# Altium PCB PCB.PcbDoc
Units mm, origin at the board's own origin, x right, y up, seen from the top; angles counter-clockwise.
Board outline 45 x 99.64 mm, 2 copper layers (Top Layer, Bottom Layer); 80 components, 50 nets, 243 pads, 87 vias.
Unrouted connection lines stored in the file: 13.
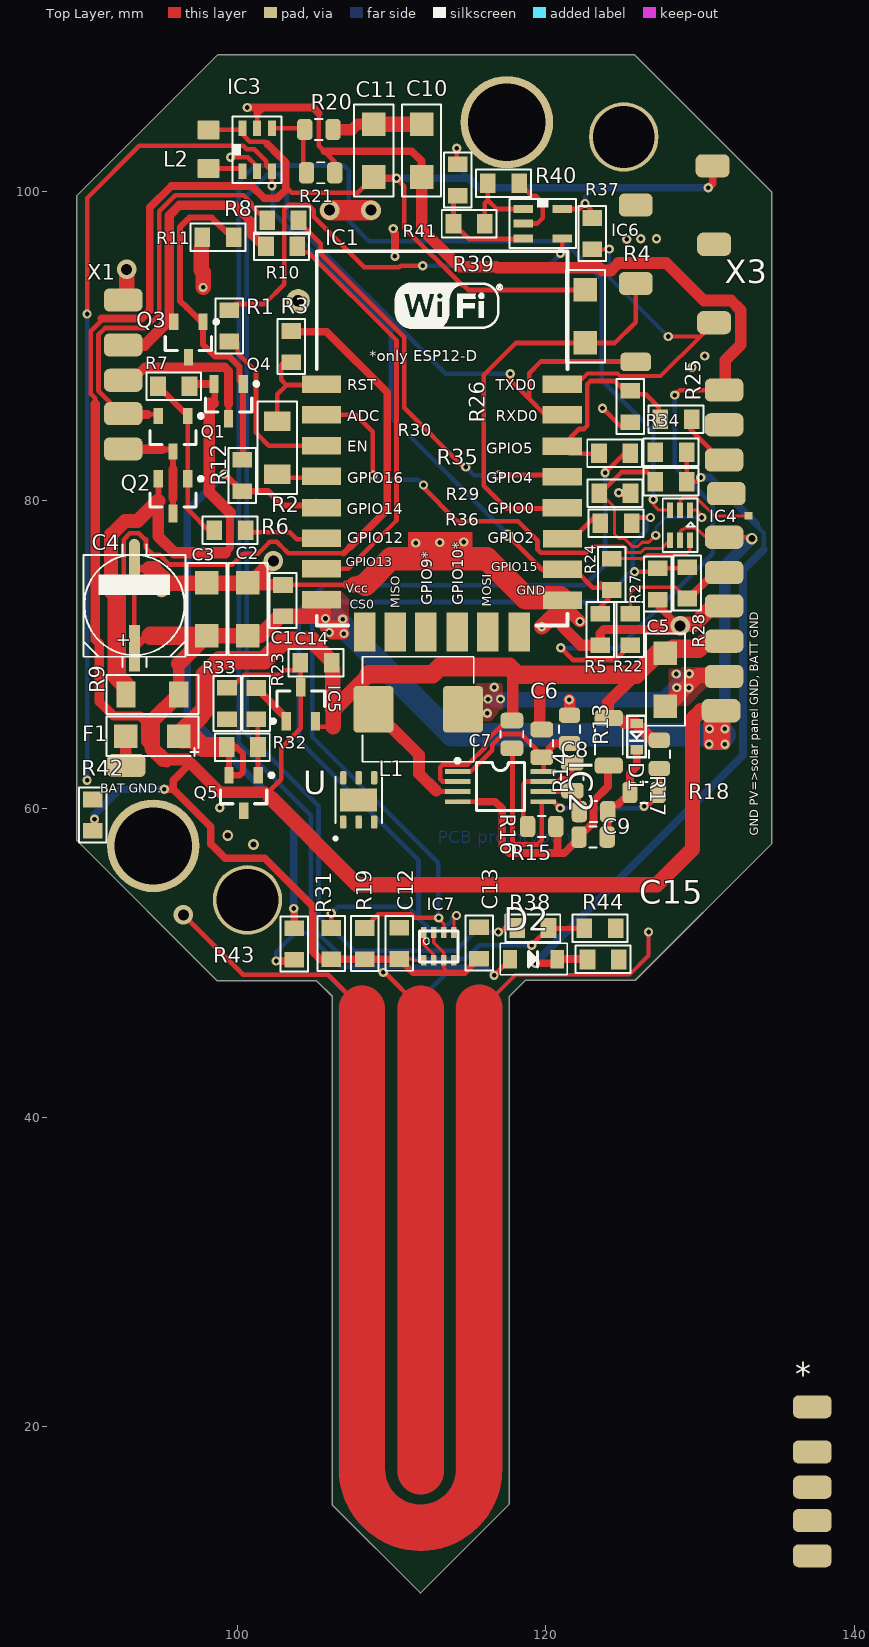
[diagram p0: Top Layer view]
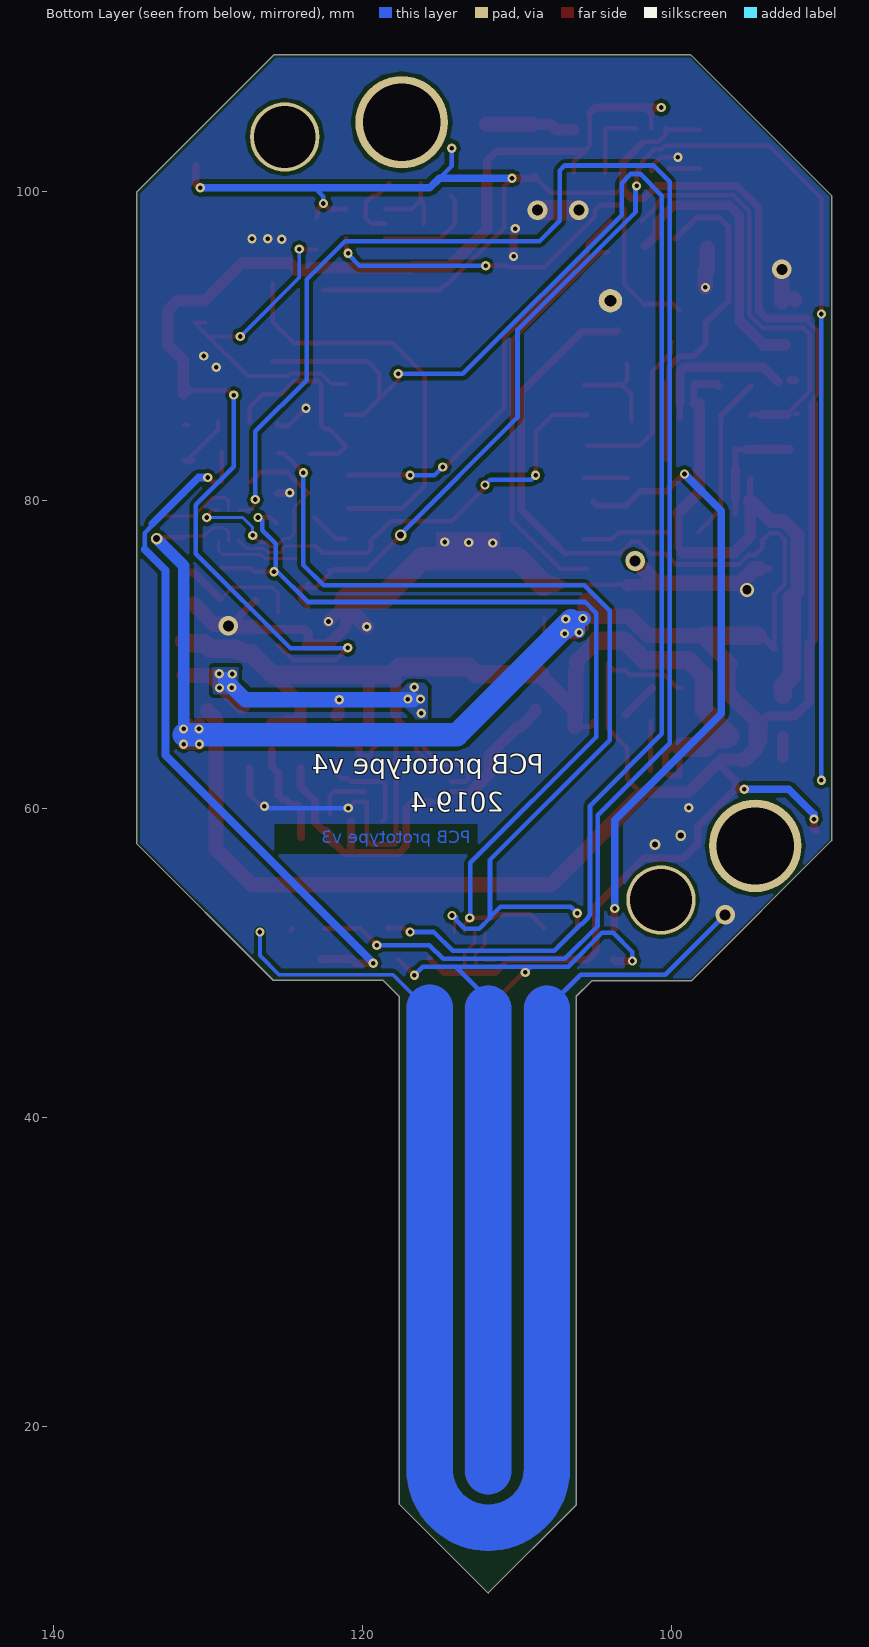
[diagram p1: Bottom Layer view, seen from below]

## Layer stack, top to bottom
Top Solder: solder mask 0.0102, Solder Resist, Dk 3.5
Top Layer: signal copper 0.0356
Dielectric1: dielectric 0.32, FR-4, Dk 4.8
Bottom Layer: signal copper 0.0356
Bottom Solder: solder mask 0.0102, Solder Resist, Dk 3.5

## Board outline
89.625,57.946 98.721,48.85 105.164,48.85 106.16,47.854 106.16,14.91 111.875,9.195 117.641,14.961 117.641,47.854 118.687,48.9 125.799,48.9 134.625,57.726 134.625,99.975 125.764,108.836 98.735,108.836 89.625,99.726

## Design rules (kind name [scope] priority, off if disabled: settings)
Clearance [All] p1: gap=0.25 ignorepadtopadclearanceinfootprint=FALSE except(0: Arc-Hole Track-Hole SMDPad-Hole THPad-Hole Via-Hole Fill-Hole Poly-Hole Region-Hole Text-Hole; 0.15: Arc-Arc Arc-Track Arc-SMDPad Track-Track Track-SMDPad; 0.2: Arc-Via Track-Via SMDPad-SMDPad; 0.5: THPad-THPad)
HoleSize [All] p1: absolutevalues=TRUE maxlimit=6.3 minlimit=0.2 maxpercent=80.000 minpercent=20.000
MinimumAnnularRing [All] p1: minimumring=0.13
MinimumSolderMaskSliver [All] p1 off: minsoldermaskwidth=0.254
PlaneConnect [All] p1: planeconnectstyle=Direct reliefexpansion=0.508 reliefentries=4 reliefconductorwidth=0.254 reliefairgap=0.254
PolygonConnect [All] p1: connectstyle=Direct reliefconductorwidth=0.254 reliefentries=4 polygonreliefangle="90 Angle" airgapwidth=0.254
RoutingVias [All] p1: holewidth=0.3 width=0.6 viastyle="Through Hole" minholewidth=0.2 minwidth=0.45 maxholewidth=6.3 maxwidth=6.7
SilkToSilkClearance [All] p1: silktosilkclearance=0.15
SilkToSolderMaskClearance [IsPad] p1: minsilkscreentomaskgap=0.15 clearancetoexposedcopper=TRUE
SolderMaskExpansion [All] p1: expansion=0.102 istentingtop=FALSE useseparateexpansions=TRUE expansionbottom=0.102 istentingbottom=TRUE
Width [All] p1: maxlimit=3 minlimit=0.15 preferedwidth=0.3 minimp=50.000000 maximp=50.000000 favimp=50.000000
25 further rules are at their usual default settings.

## Classes and differential pairs
net class "Voltage Booster": +5V GND GPIO15 NetIC3_1 NetIC3_4 VCC
net class SPV1040: "GND PV." NetC6_1 NetC7_1 NetC8_1 NetC8_2 NetC9_2 NetIC2_3 PV. VCC
net class H-Bridge: GND MOTOR_CONTROL1/PWM MOTOR_CONTROL2 MOTOR_SENSOR1 MOTOR_SENSOR2 NetQ1_1 NetQ1_2 NetQ1_3 NetQ2_2 NetQ3_1 NetQ3_2 NetQ3_3 VCC
net class ESP8266: GND VCC
component class Schematic: * C1 C2 C3 C4 C5 C6 C7 C8 C9 C10 C11 C14 D1 IC1 IC2 IC3 ICx L1 L2 R1 R2 R3 R4 R5 R13 R14 R15 R16 R17 R18 R20 R21 R33 R35 R36 R37 X3
component class H-bridge: Q1 Q2 Q3 Q4 R6 R7 R8 R9 R10 R11 R12 X1
component class Sheet2: C12 C13 C15 D2 F1 IC4 IC5 IC6 IC7 Q5 R19 R22 R23 R24 R25 R26 R27 R28 R29 R30 R31 R32 R34 R38 R39 R40 R41 R42 R43 R44 U

## Components (designator, comment, footprint, x,y, rotation, side; value= is the part's Value field where it differs from the comment)
* "szelep_csati1" Szelep_csati 135.992,10.846 r0 top
C1 "1nF" 0805C-TBD 102.975,72.725 r90 top
C2 "100nf" 1206C-GENERIC 100.7,71.225 r90 top value=100nF
C3 "22uF" 1206C-GENERIC 98.05,71.225 r90 top
C4 "470uF" PANACAP-D-GENERIC 93.35,73.2 r90 top
C5 "22uF" 1206C-GENERIC 127.75,66.65 r90 top
C6 "1nF" CAPC200X125X100L40N 119.736,64.237 r90 top
C7 "1nF" CAPC200X125X100L40N 117.805,64.821 r90 top
C8 "1uF" CAPC200X125X100L40N 121.717,62.078 r270 top
C9 "22uF" CAPC320X160X50L40N 124.079,64.338 r270 top
C10 "10uF" 1206C-GENERIC 111.95,100.928 r90 top
C11 "22uF" 1206C-GENERIC 108.85,100.928 r90 top
C12 "1nF" 0805C-GENERIC 110.5,50.525 r90 top
C13 "100nF" 0805C-GENERIC 115.675,50.55 r90 top
C14 "22uF" 0805C-GENERIC 104.35,69.45 r0 top
C15 "2u2" 0805C-GENERIC 122.949,50.241 r0 top value=2.2uF
D1 "DIODE-TRANSIL-GENERIC" SOD523 125.882,63.832 r90 top
D2 "1N5819" sod-123 120.74,50.267 r180 top
F1 "0" Fuse_1206 97.625,67.575 r180 top
IC1 "ESP8266 ESP-12-E" "ESP8266 ESP-12-E" 122.05,71.1 r0 top
IC2 "SPV1040" SPV1040 117.057,61.443 r0 top
IC3 "MCP1624" SOT23-6 100.35,101.428 r90 top
IC4 "FSA3157" SC70-6 129.35,79.35 r180 top
IC5 "TC54VN2702" SOT-23A-CB3_L 104.128,66.777 r90 top
IC6 "MAX6433" SOT23-5 118.53,98.857 r0 top
IC7 "BMP280" BMP280 114.55,49.825 r90 top
L1 "INDUCTOR" INDM730X660X300L160X290N 111.735,66.446 r180 top value=10uH
L2 "4.7uH" INDM2520X190N 98.15,102.728 r90 top
Q1 "AO3400A" INF-PG-SOT23_N 95.85,84.3 r270 top
Q2 "SI2301CDS" Micro3_N 95.85,80.25 r270 top
Q3 "AO3400A" INF-PG-SOT23_N 96.85,90.4 r270 top
Q4 "SI2301CDS" Micro3_N 99.45,86.4 r270 top
Q5 "IRLML6244" INF-PG-SOT23_N 100.425,61.025 r270 top
R1 "4.7K" 0805R-10K#1 99.5,92.3 r270 top value=4.7k
R2 "1k" 1206FB-50Z 102.6,85.1 r270 top
R3 "10K" 0805R-10K#1 103.518,90.957 r270 top value=10k
R4 "10K" 1206C-GENERIC 122.568,90.195 r90 top value=10k
R5 "10K" 0805R-10K#1 123.525,70.6 r90 top value=10k
R6 "390" 0805R-390 100.3,78.05 r180 top
R7 "4.7k" 0805R-10K#1 96.914,87.376 r180 top
R8 "1K" 0805R-1K 103.725,98.125 r180 top value=1k
R9 "1R" 1206FB-50Z 92.8,67.4 r0 top value=1
R10 "1K" 0805R-1K 102.125,96.45 r0 top value=1k
R11 "4.7k" 0805R-10K#2 99.531,97.028 r180 top
R12 "390" 0805R-390 100.325,82.35 r270 top
R13 "1K" RESC200X125X70L40N 121.539,65.151 r90 top value=1k
R14 "1K" RESC200X125X70L40N 123.088,59.817 r180 top value=1k
R15 "1K" RESC200X125X70L40N 119.736,58.852 r180 top value=1k
R16 "530m" RESC200X125X70L40N 123.063,58.166 r180 top
R17 "200k" RESC200X125X70L40N 127.356,63.525 r90 top
R18 "360k" RESC200X125X70L40N 126.365,61.062 r0 top
R19 "4.7k" 0805R-4K7 108.275,52.025 r270 top
R20 "200k" RESC200X125X70L40N 105.299,104.001 r0 top
R21 "680k" RESC200X125X70L40N 105.413,101.2 r0 top
R22 "4.7k" 0805R-4K7 125.475,70.85 r90 top
R23 "390" 0805R-470 101.25,67.575 r270 top
R24 "=390+' '+Tolerance" 0805R-390 124.275,74.425 r90 top value=390
R25 "2.2k" 0805R-4K7 127.674,85.242 r0 top
R26 "4.7k" 0805R-4K7 125.464,85.293 r90 top
R27 "3.3k" 0805R-4K7 127.25,73.8 r90 top
R28 "2.2k" 0805R-4K7 129.15,75.4 r270 top
R29 "='100k'+' '+Tolerance" 0805R-100 125.235,80.442 r180 top value=100k
R30 "='220k'+' '+Tolerance" 0805R-100 128.868,81.178 r180 top value=220k
R31 "4.7k" 0805R-4K7 106.1,52.025 r270 top
R32 "150K" 0805R-150K 101.1,64 r180 top value=150k
R33 "10K" 0805R-10K#1 99.35,65.8 r90 top value=10k
R34 "='510k'+' '+Tolerance" 0805R-100 127.344,83.109 r0 top value=510k
R35 "22" 0805R-22 125.225,83.025 r180 top
R36 "22" 0805R-22 125.312,78.486 r180 top
R37 "10k" 0805R-22 123,96.495 r90 top
R38 "8k2 1%" 0805R-4K7 118.396,52.275 r0 top value=8k2
R39 "1M" 0805R-TBD 114.288,99.974 r90 top
R40 "240k" 0805R-TBD 116.5,100.525 r0 top
R41 "22K" 0805R-TBD 114.275,97.9 r0 top value=22k
R42 "0" 0805R-TBD 90.641,58.826 r90 top
R43 "='100k'+' '+Tolerance" 0805R-100 103.7,52 r270 top value=100k
R44 "2.2k 1%" 0805R-1K 124.275,52.25 r180 top value=2.2k
U "HDC1080DMBT" SON100P300X300X80-7N 107.875,60.575 r90 top
X1 "Component_1" Szelep_csati 91.35,82.55 r0 top
X3 "X?" "program port" 125.825,88.95 r0 top

## Footprints (in the part's own frame and the unit in brackets; to place one, negate y for a bottom-side part, rotate by r counter-clockwise, add the part's x,y. Pads: shape width x height; smd on the part's side, far side on the other; paste and mask are expansions set on the pad)
0805C-GENERIC [mil] "CAPACITOR 0805"
  rect 40x50 smd: 1(-10,0) 2(70,0)
  silkscreen extent -40,-35 100,35, body extent -11,-25 70,25, height 26
0805C-TBD [mil] "CAPACITOR 0805"
  rect 40x50 smd: 1(-10,0) 2(70,0)
  silkscreen extent -40,-35 100,35, body extent -11,-25 70,25, height 26
0805R-1K [mil] "RESISTOR 0805"
  rect 40x50 smd: 1(-10,0) 2(70,0)
  silkscreen extent -40,-35 100,35, body extent -11,-25 70,25, height 27
0805R-4K7 [mil] "RESISTOR 0805"
  rect 40x50 smd: 1(-10,0) 2(70,0)
  silkscreen extent -40,-35 100,35, body extent -11,-25 70,25, height 27
0805R-10K#1 [mil] "RESISTOR 0805"
  rect 40x50 smd: 1(0,0) 2(80,0)
  silkscreen extent -30,-35 110,35, body extent -1,-25 80,25, height 27
0805R-10K#2 [mil] "RESISTOR 0805"
  rect 40x50 smd: 1(-10,0) 2(70,0)
  silkscreen extent -40,-35 100,35, body extent -11,-25 70,25, height 27
0805R-22 [mil] "RESISTOR 0805"
  rect 40x50 smd: 1(-10,0) 2(70,0)
  silkscreen extent -40,-35 100,35, body extent -11,-25 70,25, height 27
0805R-100 [mil] "RESISTOR 0805"
  rect 40x50 smd: 1(-10,0) 2(70,0)
  silkscreen extent -40,-35 100,35, body extent -11,-25 70,25, height 27
0805R-150K [mil] "RESISTOR 0805"
  rect 40x50 smd: 1(-10,0) 2(70,0)
  silkscreen extent -40,-35 100,35, body extent -11,-25 70,25, height 27
0805R-390 [mil] "RESISTOR 0805"
  rect 40x50 smd: 1(-10,0) 2(70,0)
  silkscreen extent -40,-35 100,35, body extent -11,-25 70,25, height 27
0805R-470 [mil] "RESISTOR 0805"
  rect 40x50 smd: 1(-10,0) 2(70,0)
  silkscreen extent -40,-35 100,35, body extent -11,-25 70,25, height 27
0805R-TBD [mil] "RESISTOR 0805 VALUE TO BE DETERMINED"
  rect 40x50 smd: 1(-10,0) 2(70,0)
  silkscreen extent -40,-35 100,35, body extent -11,-25 70,25, height 27
1206C-GENERIC [mil] "Polarized Capacitor (Radial); 2 Leads"
  rect 60x60 smd: 1(0,0) 2(135,0)
  silkscreen extent -50,-50 185,50, body extent -8,-29 147,29, height 46
1206FB-50Z [mm] "FERRITE BEAD 1206"
  rect 1.25x1.7 smd: 1(0,0) 2(3.429,0)
  silkscreen extent -1.27,-1.27 4.7,1.27, body extent 0.11,-0.81 3.31,0.8, height 0.84
BMP280 [mm]
  rect 0.7x0.35 smd: 1(2.156,2.458) 2(2.156,1.808) 3(2.156,1.158) 4(2.156,0.508) 5(0.358,0.501) 6(0.358,1.164) 7(0.358,1.814) 8(0.358,2.464)
  silkscreen extent 0.25,0.23 2.25,2.73
CAPC200X125X100L40N [mm] "0805"
  rrect50% 1.01x1.47 smd: 1(-0.9,0) 2(0.9,0)
  silkscreen extent -0.22,-0.73 0.22,0.73, body extent -1,-0.62 1,0.63, height 1
CAPC320X160X50L40N [mm] "Capacitor, Chip; 1206, 3.20 mm L X 1.60 mm W X 0.50 mm H body"
  rrect48% 1.04x1.82 smd: 1(-1.54,0) 2(1.54,0)
  silkscreen extent -0.84,-0.9 0.84,0.9, body extent -1.6,-0.8 1.6,0.8, height 0.5
"ESP8266 ESP-12-E" [mil] "ESP8266 ESP-12-E"
  rect 100x45 smd: 1(-653,646) 2(-653,568) 3(-653,489) 4(-653,411) 5(-653,331) 6(-653,253) 7(-653,175) 8(-653,96) 15(-38,95) 16(-38,174) 17(-38,252) 18(-39,331) 19(-39,410) 20(-39,488) 21(-39,568) 22(-39,646)
  rect 55x100 smd: 9(-543,14) 10(-465,14) 11(-387,14) 12(-307,14) 13(-229,14) 14(-149,14)
  silkscreen extent -665,30 -25,985, body extent -661,37 -31,981, height 86
Fuse_1206 [mil]
  rect 60x60 smd: 1(55,113) 2(190,113)
  silkscreen extent 5,63 240,163
INDM730X660X300L160X290N [mm] "Inductor, Molded Body; 7.20 mm L X 6.60 mm W X 3.00 mm H body"
  rrect19% 2.61x3.01 smd: 1(-2.9,0) 2(2.9,0)
  silkscreen extent -3.6,-3.4 3.6,3.4, body extent -3.65,-3.3 3.65,3.3, height 3
INDM2520X190N [mm] "Inductor, molded body 2.5x2.0mm"
  round 0.508 on Mech15: 0(0,0)
  rrect20% 1.25x1.45 smd: 1(-1.25,0) 2(1.25,0)
  Top Layer pour cut-out: -0.7,1 0.7,1 0.7,-1 -0.7,-1
  body extent -1.25,-1 1.25,1, height 1.79
INF-PG-SOT23_N [mm] "SOT23, 3-Leads, Body 2.9x1.3mm, Pitch 0.95mm, IPC Medium Density"
  rect 1.05x0.6 smd: 1(-1.15,0.95) 2(-1.15,-0.95) 3(1.15,0)
  silkscreen extent -1.27,-1.5 0.7,1.93, body extent -0.7,-1.5 0.7,1.5, height 1.1
Micro3_N [mm] "SOT23, 3-Leads, Body 2.9x1.3mm, Pitch 0.95mm, Lead Span 2.3mm, IPC Medium Density"
  rect 1.15x0.6 smd: 1(-1.125,0.95) 2(-1.125,-0.95) 3(1.125,0)
  silkscreen extent -1.25,-1.5 0.7,1.93, body extent -0.7,-1.5 0.7,1.5, height 1.12
PANACAP-D-GENERIC [mm] "Radial Cap, Thru-Hole; 2 Leads; 0.3 in Pin Spacing"
  rect 3x0.7 smd: +(-2.794,0)
  oval 3x0.7 smd: -(2.794,0)
  silkscreen extent -4,-3.3 3.93,3.3, body extent -3.5,-3.3 3.5,3.3, height 5.4
"program port" [mm]
  rrect50% 2x1.2 smd: 1(0,0)
  rrect50% 2.2x1.5 smd: 2(5.08,2.54) 3(0,5.08) 4(5.08,7.62) 5(0,10.16) 6(4.98,12.7)
RESC200X125X70L40N [mm] "Resistor, Chip; 0805, 2.00 mm L X 1.25 mm W X 0.70 mm H body"
  rrect51% 0.99x1.38 smd: 1(-0.915,0) 2(0.915,0)
  silkscreen extent -0.24,-0.68 0.24,0.68, body extent -1,-0.62 1,0.63, height 0.7
SC70-6 [mm]
  rect 0.4x1 smd mask+0.05: 1(0,0) 2(0.65,0) 3(1.3,0) 4(1.3,1.95) 5(0.65,1.95) 6(0,1.95)
  silkscreen extent -0.48,-0.75 1.78,2.7, body extent -0.48,0 1.78,1.96, height 1.04
SOD523 [mm]
  rect 0.6x0.8 smd: A(1.7,0) K(0,0)
  silkscreen extent -0.5,-0.6 2.2,0.6, body extent -0.05,-0.53 1.75,0.55, height 0.53
sod-123 [mm]
  rect 0.9x1.2 smd: A(3.048,0) K(0,0)
  silkscreen extent -0.64,-1.02 3.68,1.02, body extent -0.18,-0.87 3.3,0.87, height 0.79
SON100P300X300X80-7N [mm]
  rrect50% 0.86x0.42 smd: 1(-1.435,1) 2(-1.435,0) 3(-1.435,-1) 4(1.435,-1) 5(1.435,0) 6(1.435,1)
  rect 1.5x2.4 smd paste-2: 7(0,0)
  silkscreen extent -2.6,-1.5 1.5,1.6
SOT23-5 [mil]
  rect 50x20 smd: 1(0,0) 2(0,-37) 3(0,-75) 4(100,-75) 5(100,0)
  silkscreen extent -35,-100 135,25, body extent 2,-95 98,20, height 52
SOT23-6 [mil]
  rect 40x20 smd: 1(-5,0) 2(-5,-37) 3(-5,-75) 4(105,-75) 5(104.41,-37.4) 6(105,0)
  silkscreen extent -35,-100 135,25, body extent 2,-95 98,20, height 52
SOT-23A-CB3_L [mm] "SOT346, 3-Leads, Body 2.9x1.5mm, Pitch 0.95mm, Lead Span 2.6mm, IPC High Density"
  rect 1.2x0.6 smd: 1(-1.1,0.95) 2(-1.1,-0.95) 3(1.1,0)
  silkscreen extent -1.22,-1.55 0.85,1.92, body extent -0.85,-1.55 0.85,1.55, height 1.45
SPV1040 [mm]
  rect 1.65x0.3 smd: 1(-2.775,0.975) 2(-2.775,0.325) 3(-2.775,-0.325) 4(-2.775,-0.975) 5(2.775,-0.975) 6(2.775,-0.325) 7(2.775,0.325) 8(2.775,0.975)
  silkscreen extent -2.9,-1.55 1.55,1.8
Szelep_csati [mm]
  rrect50% 2.5x1.5 smd: "1 - Fekete"(1.27,10.414) "2 - Zöld"(1.27,7.493) "3 - Kék"(1.27,5.207) "4 - Piros"(1.27,3.048) "5 - Sárga"(1.27,0.762)

## Part data
C1 C6 C7: library part 0805C-100nF-25V-X7R-MUR, "CAPACITOR 0805 CERAMIC", Supplier Part Number 1=490-1673-1-ND, Supplier 1=Digi-Key
C2 C3 C5 C9 C10 C11: library part 1206C-10U-35V-X7R, "GENERIC CAPACITOR NON POLARISED 1206", Manufacturer="Taiyo Yuden", Manufacturer Part Number=GMK316F106ZL-T, Supplier Part Number 1=587-1352-2-ND, Reel=C90, Supplier 1=Digi-Key
C4: library part C+47U-6V3, "GENERIC CAPACITOR POLARISED", Supplier Part Number 1=PCE4375TR-ND, Supplier 1=Digi-Key
C8: library part 0805C-TBD, "CAPACITOR 0805 CERAMIC VALUE TO BE DETERMINED"
C12: library part C0805-GENERIC, "100nF"
C13: library part C0805-GENERIC
C14: library part C0805-GENERIC, "GENERIC CAPACITOR NON POLARISED0603", Assembly=No
C15: library part 0805C-2U2-6V3-X5R-PAN, "CAPACITOR 0805 CERAMIC", Manufacturer="Panasonic - ECG", Manufacturer Part Number=ECJ-1VB0J225K, Supplier Part Number 1=PCC2273TR-ND, Reel=C7, Supplier 1=Digi-Key
D1: "GENERIC TRANSIL"
D2: library part BZT52C5V6, "1N5819 SOD123", Supplier Part Number 1=BZT52C5V6-FDITR-ND, Part number=1N5819, Supplier 1=Digi-Key
F1: library part Fuse, Alternative=0
IC3: library part MCP1623, Part number=MCP1624
IC5: library part TC54VN2702ECB713, "1µA Voltage Detector, Open-Drain Output, 2.7V, 3-Pin SOT-23A, Industrial Temperature, Tape and Reel", Supplier Part Number 1=TC54VN2702ECB71TR-ND, ComponentLink1Description=Datasheet, ComponentLink1URL=http://ww1.microchip.com/downloads/en/DeviceDoc/21434h.pdf, ComponentLink2Description="Packaging Specification", ComponentLink2URL=http://www.microchip.com/stellent/groups/techpub_sg/documents/packagingspec/en012702.pdf, ComponentLink3Description="Microchip.com Home", ComponentLink3URL=http://www.microchip.com/, DatasheetVersion="revH, Dec-2007", PackageDescription="3-Lead Plastic Small Outline Transistor (CB) [SOT-23A]", PackageReference=SOT-23A-CB3, PackageVersion="revBB, Aug-2009", Part number=TC54VN2702, Published=29-Jan-2009, Publisher="Altium Limited", Supplier 1=Digi-Key, Supplier 2=Digi-Key, Supplier 3=Digi-Key, Supplier 4=Farnell, Supplier Part Number 2=TC54VN2702ECB71CT-ND, Supplier Part Number 3=TC54VN2702ECB71DKR-ND, Supplier Part Number 4=1292289
IC6: library part MAX6433-MAX6435, "MAX6433-MAX6435", Part number=MAX6433
L1: LCSC Part #=C132141, Alternatives=C139506
L2: library part INDUCTOR, "INDUCTOR", LCSC Part #=C1049
Q1: library part BSS806N, "N-Channel OptiMOS 2 Small-Signal-Transistor, 20 V VDS, 2.3 A ID, -55 to 150 degC, PG-SOT23, Reel, Green", Manufacturer=Infineon, PartNumber=IRLML6244, Alternatives="BSS806N, IRLML6244, IRLML6344", ComponentLink1Description="Manufacturer URL", ComponentLink1URL=http://www.infineon.com/, ComponentLink2Description=Datasheet, ComponentLink2URL=http://www.infineon.com/dgdl/BSS806N_Rev2.3_.pdf?folderId=db3a3043156fd573011622e10b5c1f67&fileId=db3a304330f686060131185f0553451c, ComponentLink3Description="Package Specification", ComponentLink3URL=http://www.infineon.com/dgdl/SOT23-Package_Overview.pdf?folderId=db3a30431936bc4b0119532290053c66&fileId=db3a30431936bc4b0119533468123c85, DatasheetVersion="Rev. 2.3", Green=TRUE, Halogen-free=TRUE, ID (max)="2.3 A", IDpuls (max)="9.3 A", Mounting Technology="Surface Mount", PackageDescription="3-Pin Small Outline Transistor Package, 2.9 x 1.3 mm Body, 0.95 mm Pitch", PackageReference=PG-SOT23, PackageVersion=Apr-08, Packing=Reel, Part number=AO3400A, Ptot (max)="0.5 W", QG="1.7 nC", RDS (on) (max)="57 mOhm", RDS (on) (max) (@1.8V)="82 mOhm", RDS (on) (max) (@2.5V)="57 mOhm", RthJA (max)="250 K/W", VDS (max)="20 V", VGS(th) (max)="0.75 V", VGS(th) (min)="0.3 V"
Q2 Q4: library part IRLML6401, "HEXFET Power MOSFET", Alternatives="IRLML2244, IRLML2246, IRLML6401", ComponentLink1Description="Manufacturer Link", ComponentLink1URL=http://www.irf.com/, ComponentLink2Description=Datasheet, ComponentLink2URL=http://www.irf.com/product-info/datasheets/data/IRLML6401.pdf, DatasheetVersion=2-Jul-2001, PackageDescription="3-Pin SOT-23 Package 0.95 mm Pitch, 2.3 mm Lead Span", PackageReference=Micro3, PackageVersion=Jul-2001, Part number=SI2301CDS, Published=17-Sep-2003, Publisher="Altium Limited"
Q3 Q5: library part BSS806N, "N-Channel OptiMOS 2 Small-Signal-Transistor, 20 V VDS, 2.3 A ID, -55 to 150 degC, PG-SOT23, Reel, Green", Manufacturer=Infineon, ComponentLink1Description="Manufacturer URL", ComponentLink1URL=http://www.infineon.com/, ComponentLink2Description=Datasheet, ComponentLink2URL=http://www.infineon.com/dgdl/BSS806N_Rev2.3_.pdf?folderId=db3a3043156fd573011622e10b5c1f67&fileId=db3a304330f686060131185f0553451c, ComponentLink3Description="Package Specification", ComponentLink3URL=http://www.infineon.com/dgdl/SOT23-Package_Overview.pdf?folderId=db3a30431936bc4b0119532290053c66&fileId=db3a30431936bc4b0119533468123c85, DatasheetVersion="Rev. 2.3", Green=TRUE, Halogen-free=TRUE, ID (max)="2.3 A", IDpuls (max)="9.3 A", Mounting Technology="Surface Mount", PackageDescription="3-Pin Small Outline Transistor Package, 2.9 x 1.3 mm Body, 0.95 mm Pitch", PackageReference=PG-SOT23, PackageVersion=Apr-08, Packing=Reel, PartNumber=BSS806N, Ptot (max)="0.5 W", QG="1.7 nC", RDS (on) (max)="57 mOhm", RDS (on) (max) (@1.8V)="82 mOhm", RDS (on) (max) (@2.5V)="57 mOhm", RthJA (max)="250 K/W", VDS (max)="20 V", VGS(th) (max)="0.75 V", VGS(th) (min)="0.3 V"
  Q3: Alternatives="BSS806N, IRLML6244, IRLML6344", Part number=AO3400A
  Q5: Part number=IRLML6244
R1 R3 R4 R5 R7 R11 R33: library part 0805R-10K, "RESISTOR 0805 1/4 WATT THIN FILM"
  R33: Assembly=No
R2: library part 0805R-1R, "0 vagy talan 1K? RESISTOR 0805 1/3 WATT", Supplier Part Number 1=541-1.0TADKR-ND, Reel=R84, Supplier 1=Digi-Key
R6 R12 R24: library part 0805R-390, "RESISTOR 0805 1/4 WATT THIN FILM"
R8 R10 R14 R15: library part 0805R-1K, "RESISTOR 0805 1/4 WATT THIN FILM"
R9 R13 R16: library part 0805R-1R, "RESISTOR 0805 1/3 WATT", Supplier Part Number 1=541-1.0TADKR-ND, Reel=R84, Supplier 1=Digi-Key
R17 R18: library part 0805R-680K, "RESISTOR 0805 1/4 WATT THIN FILM"
R19 R22 R25 R26 R27 R28 R31: library part 0805R-4K7, "RESISTOR 0805 1/4 WATT THIN FILM"
  R22 R27 R28: Assembly=No
R20: library part 0805R-820K, "RESISTOR 0805 1/4 WATT THIN FILM"
R21: library part 0805R-560K, "RESISTOR 0805 1/4 WATT THIN FILM"
R23: library part 0805R-470, "RESISTOR 0805 1/4 WATT THIN FILM"
R29 R30 R34 R43: library part 0805R-100, "RESISTOR 0805 1/4 WATT THIN FILM"
R32: library part 0805R-150K, "RESISTOR 0805 1/4 WATT THIN FILM"
R35 R36 R37: library part 0805R-22, "RESISTOR 0805 1/4 WATT THIN FILM"
R38: library part 0805R-4K7, "RESISTOR 0805 1/4 WATT THIN FILM", Tolerance=1%
R39 R40 R41 R42: library part 0805R-TBD, "RESISTOR 0805 VALUE TO BE DETERMINED"
  R39: Alternative=931k
  R40: Alternative=237k
  R41: Alternative=22k
  R42: Assembly=No
R44: library part 0805R-1K, "RESISTOR 0805 1/4 WATT THIN FILM", Tolerance=1%
U: "Humidity Temperature Sensor 0 ~ 100% RH IÂ²C Â±2% RH 15s Surface Mount", Package="WDFN-6 Texas Instruments", Availability=Unavailable, MF="Texas Instruments", MP=HDC1080DMBT, Price=None, SnapEDA_Link=https://www.snapeda.com/parts/HDC1080DMBT/Texas%20Instruments/view-part/472820/?ref=snap
X1: library part szelep_csati1
X3: library part "program port"
IC2: Part number=SPV1040
IC4: Part number=FSA3157
IC7: Part number=BMP280

## Free pads (board coordinates)
  round 6 hole 5: 0(94.575,57.6) 1(117.475,104.475)
  rect 0.5x0.5 smd: 0(133.125,78.975)
  rrect50% 2.5x1.5 smd: 1(131.55,87.125) 2(131.55,84.875) 3(131.55,82.589) 4(131.687,80.416) 5(131.55,77.589) 6(131.55,75.303) 7(131.55,73.144) 8(131.55,70.858) 9(131.55,68.572) 9(131.55,68.572) 10(131.35,66.35) 11(92.825,62.8)
  round 1.524 hole 0.762: 2(103.95,92.913)
  round 4.5 hole 4: 2(125.05,103.525) 3(100.675,54.1)

## Via types
v1: diameter 0.6, hole 0.3, Top Layer to Bottom Layer, tented bottom, 76 vias
v2: diameter 1.27, hole 0.711, Top Layer to Bottom Layer, tented bottom, 6 vias
v3: diameter 0.75, hole 0.45, Top Layer to Bottom Layer, tented bottom, 2 vias
v4: diameter 0.7, hole 0.4, Top Layer to Bottom Layer, tented bottom, 2 vias
v5: diameter 0.9, hole 0.6, Top Layer to Bottom Layer, tented bottom, 1 vias

## Nets (pads, with @x,y where several pads share a name; then routed paths per layer and width w, separated by ;. In a path a pad name is that pad's centre, name@x,y a point inside that pad or via, vN(x,y) a via of type N, cw(c..) or ccw(c..) an arc to the next point about the centre after c; other vN are vias at no path point)
+5V: C10.1 IC3.5 pad.1@131.55,87.125 R21.2 R22.1 | length 83.2
  Top Layer w0.3: IC3.5 101.3,105.078 ; 105.299,105.051 105.299,102.951 105.65,102.6 106.328,101.922 R21.2 ; v1(120.975,70.425) 121.758,69.642 124.521,69.642 R22.1 ; v1(128.35,86.8) 128.675,87.125 131.4,87.125 pad.1@131.625,86.9
  Top Layer w0.5: v1(100.653,105.428) 101.65,105.428 ; 101.3,105.078 101.65,105.428 ; 105.299,105.051 104.922,105.428 101.65,105.428 ; 105.65,102.6 111.32,102.6 111.95,101.97 C10.1
  Top Layer w0.75: C10.1 111.95,97.555 114.4,95.105 116.796,95.105 116.851,95.051 123.479,95.051 123.661,94.869 124.22,94.869 124.706,95.355 127.797,95.355 130.227,92.925 132,92.925 132.625,92.3 132.625,90.05 131.625,89.05 pad.1@131.625,86.9 ; pad.1@131.4,87.125 pad.1@131.55,87.125
  Bottom Layer w0.3: v1(120.975,70.425) 121,70.4 124.675,70.4 130.804,76.529 130.804,79.694 128.35,82.148 v1(128.35,86.8)
ADC: IC1.2 IC4.4 | length 29.9
  Top Layer w0.2: 123.044,77.011 125.034,77.011 125.21,76.835 125.21,76.603 126.142,76.603 126.401,76.862 127.512,76.862 127.875,77.225 IC4.4
  Top Layer w0.3: IC1.2 IC1.2@105.943,85.527 ; IC1.2@105.675,85.45 105.866,85.45 IC1.2@105.943,85.527 ; v1(108.8,81.6) 108.8,84.425 107.698,85.527 IC1.2@105.943,85.527 ; v1(112.075,80.975) 112.025,80.925 111.95,80.925 114.237,78.638 118.2,78.638 119.465,77.373 119.465,76.784 119.67,76.579 122.612,76.579 123.044,77.011
  Bottom Layer w0.3: v1@108.875,81.775 108.75,81.65 109.074,81.325 111.725,81.325 v1(112.075,80.975)
DELAYED_RESET: R33.1
EN: IC6.4 R1.1 | length 30.5
  Top Layer w0.3: R1.1 99.757,92.557 99.9,92.7 101.775,92.7 103.045,93.97 103.045,98.829 103.326,99.11 104.632,99.11 104.961,98.781 104.961,98.345 108.226,95.079 110.516,95.079 110.61,95.174 v1(112.027,95.174) ; v1(120.945,95.98) 121.07,96.104 IC6.4
  Bottom Layer w0.3: v1(112.027,95.174) 120.206,95.174 120.945,95.913 v1(120.945,95.98)
FLOWMETER: IC1.20 R25.1 R26.2 R35.2 | length 13.8
  Top Layer w0.3: R35.2@123.425,83 121.555,83 IC1.20 122.17,84.606 122.474,84.606 122.69,84.821 122.69,87.507 122.895,87.712 124.455,87.712 125.314,86.853 125.55,86.853 126.472,86.853 127.321,86.004 R25.1@127.321,85.025
GND: "X1.1 - Fekete" C1.2 C2.2 C3.2 C4.- C10.2 C11.2 C12.2 C13.2 C15.2 IC1.15 IC3.2 IC4.2 IC6.2 IC7.1 IC7.5 IC7.7 pad.0@133.125,78.975 pad.2@103.95,92.913 pad.7 Q5.3 R5.1 R11.2 R20.2 R26.1 R27.1 R29.1 R34.1 R40.2 R44.1 X3.4 X3.5 | length 284.6
  Top Layer w0.2: IC7.1@112.092,51.956 112.092,51.183 112.736,50.539 IC7.7@112.736,50.158 ; IC7.7@112.661,49.933 IC7.7@112.661,50.239 ; IC4.2 128.7,79.95 128.9,80.15 129.749,80.15 130.924,78.975 pad.0@133.125,78.975
  Top Layer w0.254: 115.685,47.117 115.914,47.117 118.047,49.251 125.413,49.251 126.658,50.495 v1(126.658,52.019)
  Top Layer w0.3: v2(96.525,53.125) 100.399,49.251 105.906,49.251 108.09,47.066 ; v1(99.581,102.21) 100.699,102.21 101.29,101.618 IC3.2 ; C1.2@102.975,74.525 107.05,74.525 ; R40.2 119.083,99.72 119.343,99.72 119.8,99.263 119.8,98.273 119.444,97.917 IC6.2 ; v1(123.675,85.95) 124.825,84.8 125.525,84.8 R26.1@125.525,85.004 ; R44.1 R44.1@124.647,52.132
  Top Layer w0.5: C4.-@93.681,75.544 94.319,75.544 ; 107.05,74.525 107.55,74.525 ; v1(110.122,97.587) 110.142,97.568 110.142,97.358 110.224,97.276 v1(110.224,95.783) ; R27.1@126.95,73.5 127.371,73.079 128.588,71.863 128.6,71.85 v2@128.8,71.85
  Top Layer w0.508: v1(124.727,80.467) 125.464,80.467 R29.1
  Top Layer w0.6: R5.1 123.525,71.375 123.762,71.612 126.887,71.612
  Top Layer w0.75: C2.2@100.525,74.625 100.625,74.525 102.875,74.525 C1.2@102.875,74.45 ; R20.2@106.328,104 107.45,104 107.807,104.357 C11.2 ; IC1.15@120.027,73.676 IC1.15@120.127,73.575 ; IC1.15 121.085,73.14 121.085,71.79 122.275,70.6 R5.1 R5.1@123.575,70.6
  Top Layer w0.8: IC1.15@121.209,73.14 v1(122.213,72.136)
  Top Layer w1: 91.995,92.964 92.095,93.064 ; 92.85,92.8 v2(92.85,94.95) ; 94.319,75.544 94.631,75.544 95.55,74.625 ; v5(95.111,74.186) 95.55,74.625 ; 97.693,96.3 97.693,94.882 97.8,94.775 v1(97.8,93.775) ; C3.2@98.025,74.625 95.55,74.625 ; C3.2@98.05,74.625 C2.2@100.525,74.625 ; C2.2 100.954,74.654 v2(102.35,76.05) ; 107.55,74.525 107.575,74.55 107.973,74.55 ; v2(108.675,98.775) 108.7,98.775 v2@108.725,98.8 ; C11.2@108.968,104.357 C10.2 ; v1(119.735,71.79) IC1.15@121.085,73.14 ; 127.075,71.775 128.5,71.775 128.588,71.863 128.675,71.95 129.632,71.95 pad.7@130.932,73.25
  Top Layer w1.2: 107.973,74.55 108.32,74.55
  Top Layer w1.3: v2(106,98.775) v2(108.675,98.775)
  Top Layer w1.5: 108.32,74.55 109.97,76.2 116.177,76.2 118.702,73.676 120.027,73.676 120.922,73.676 IC1.15
  Top Layer w3: 108.09,17.231 ccw(c111.89,17.231) 115.69,17.231 ; 108.09,17.231 108.09,47.066 ; 115.685,17.231 115.685,47.117
  Bottom Layer w0.254: 115.66,47.117 115.914,47.117 118.047,49.251 125.413,49.251 126.658,50.495 v1(126.658,52.019)
  Bottom Layer w0.3: v2(96.525,53.125) 100.399,49.251 105.881,49.251 108.065,47.066
  Bottom Layer w1: v2(102.35,76.05) v2@102.375,76.075 ; v2@102.35,76.1 v2@102.375,76.075 ; v2@102.475,76.175 v2@102.375,76.075
  Bottom Layer w3: 108.065,17.231 ccw(c111.865,17.231) 115.665,17.231 ; 108.065,17.231 108.065,47.066 ; 115.66,17.231 115.66,47.117
  other v1: 98.87,60.071 111.57,77.216 113.125,77.25 114.68,77.284 129.477,88.595 130.29,89.332 125.235,96.901 126.15,96.926 127.166,96.926
  other v2: 128.706,71.854
  other v4: 101.055,57.683 99.4,58.275
"GND PV.": C5.2 C6.2 C7.2 C9.1 C14.2 D1.A F1.1 IC2.2 IC5.2 pad.8 Q5.2 R17.2 R32.2 | length 77.6
  Top Layer w0.3: IC5.2 105.078,65.464 105.228,65.314 106.223,65.314 ; IC2.2 113.307,61.768 113.157,61.918 113.157,62.692 113.332,62.868 114.952,62.868 116.069,63.985 116.069,64.337 117.028,65.296 117.132,65.296 117.557,65.721 C7.2
  Top Layer w0.4: R32.2 99.945,64 100.394,63.551 100.394,62.408 100.161,62.175 Q5.2 ; Q5.2@99.475,62.475 R32.2@99.475,63.85
  Top Layer w0.75: C7.2@117.856,66.164 117.856,68.416 118.132,68.692 ; C6.2 119.609,65.264 119.609,68.184 120.117,68.692 ; C9.1@124.028,65.726 124.028,66.9 125.82,68.692 125.845,68.692 ; C9.1 124.224,65.733 124.906,65.733 125.107,65.532 D1.A 125.882,65.482 126.804,64.56 127.236,64.56 R17.2
  Top Layer w1: 104.824,70.877 106.116,69.585 106.12,69.585 106.128,69.577 C14.2 106.136,69.442 106.136,69.074 106.188,69.022 106.188,66.347 108.545,68.704 ; 106.223,65.314 106.223,66.382
  Top Layer w1.2: 97.915,66.392 97.915,68.671 98.881,69.637 101.767,69.637 103.007,70.877 103.248,70.877 103.257,70.885 104.816,70.885 104.824,70.877 ; 108.545,68.704 112.636,68.704 113.118,69.186 117.638,69.186 118.132,68.692 120.117,68.692 125.82,68.692 ; 125.845,68.692 127.232,70.079 C5.2 127.912,70.241 128.146,70.241 128.263,70.358 129.878,70.358 130.25,70.73 131.422,70.73 pad.8
  Top Layer w1.3: 97.604,66.081 F1.1 96.39,64.543 97.215,64.543 97.757,64 R32.2
GPIO15: IC1.16 IC3.3 R5.2 R24.1 | length 94.2
  Top Layer w0.3: v1(90.285,92.05) 90.285,99.568 93.663,102.946 100.399,102.946 100.623,102.722 101.126,102.722 101.894,101.954 101.894,101.662 IC3.3 v1(102.255,100.35) ; v3(117.539,77.724) 119.713,75.55 ; 119.625,75.55 119.713,75.55 ; IC1.16@121.15,75.52 121.855,75.52 IC1.16@121.925,75.45 ; IC1.16@121.15,75.55 119.713,75.55 ; IC1.16@122.2,75.45 IC1.16@121.925,75.45 ; R5.2@123.525,73.05 124.025,73.55 R24.1@124.025,74.325 ; 123.55,74.342 123.525,74.342 ; 123.55,74.596 123.525,74.571 123.525,74.342 ; R24.1@124.025,74.346 R24.1@124.025,74.325 ; R24.1@124.05,74.325 R24.1@124.025,74.325 ; 119.713,75.55 119.813,75.45 IC1.16@121.925,75.45 ; IC1.16@121.925,75.45 123.05,74.325 123.525,74.325 ; 123.525,74.325 R24.1@124.025,74.325 ; 123.525,74.325 123.525,74.342
  Bottom Layer w0.3: v1(90.285,61.849) v1(90.285,92.05) ; v1(102.255,100.35) 102.325,100.28 102.325,98.65 109.975,91 109.975,85.35 v3@117.57,77.755
MOTOR_CONTROL1/PWM: IC1.5 R12.2 R43.1 | length 40.2
  Top Layer w0.2: v1(99.15,81.686) v1@99.211,81.686
  Top Layer w0.4: v1@99.211,81.686 R12.2 ; R12.2@100.288,80.572 R12.2 ; IC1.5@105.075,79.896 104.833,79.654 102.934,79.654 102.017,80.572 R12.2
  Top Layer w0.5: v1(103.675,53.539) 103.7,53.514 R43.1
  Bottom Layer w0.5: v1(99.15,81.686) 96.775,79.312 96.775,66.15 103.675,59.25 v1(103.675,53.539)
MOTOR_CONTROL2: IC1.6 R6.1 | length 5.6
  Top Layer w0.3: R6.1@100.304,77.925 103.4,77.925 103.875,77.45 IC1.6@105.675,77.45
MOTOR_SENSOR1: IC1.7 R10.2 | length 26.4
  Top Layer w0.3: R10.2@104.078,96.05 104.616,96.05 110.325,90.341 110.325,85.759 ; IC1.7 107.195,75.545 110.326,78.676 110.326,85.759
MOTOR_SENSOR2: IC1.19 R8.1 | length 26.9
  Top Layer w0.3: R8.1@103.953,98.075 105.428,96.6 105.428,95.945 110.825,90.548 110.825,85.966 114.648,82.144 v1(114.821,82.144) ; v1@116.95,81.625 IC1.19@120.948,81.625
  Bottom Layer w0.3: v1(114.821,82.144) 115.35,81.615 115.35,81.604 v1(116.929,81.604)
"Nedvessegmérõ elektródára": D2.A R43.2 | length 86.7
  Top Layer w0.3: v1(109.462,49.403) 109.462,49.505 111.9,47.066 ; v1(116.65,49.225) D2.A
  Top Layer w0.5: v1(102.528,50.14) R43.2@103.618,50.14 ; R43.2@103.592,50.114 R43.2@103.618,50.14 ; R43.2@103.725,50.197 R43.2 R43.2@103.618,50.14
  Top Layer w3: 111.9,17.094 111.9,47.066
  Bottom Layer w0.3: v1(102.528,50.14) 102.528,50.724 103.772,51.968 104.499,51.968 106.693,49.775 109.115,49.775 ; v1(109.462,49.403) 109.462,49.428 109.115,49.775 ; 111.875,47.066 111.875,47.667 113.983,49.775 ; v1(116.65,49.225) 116.1,49.775 113.983,49.775 ; 109.115,49.775 113.983,49.775
  Bottom Layer w3: 111.875,17.094 111.875,47.066
NetC6_1: C6.1 IC2.1 IC2.8 R13.1 | length 10.8
  Top Layer w0.3: IC2.1 115.138,62.418 116.519,63.798 116.519,64.151 117.214,64.846 118.386,64.846 118.507,64.726 118.517,64.726 118.84,64.402 118.84,64.392 119.405,63.828 119.405,63.608 119.679,63.334 119.863,63.334 119.863,62.418 IC2.8
  Top Layer w0.5: C6.1 119.964,63.337 120.219,63.591 120.219,63.882 120.573,64.236 R13.1
NetC7_1: C7.1 IC2.5 R17.1 R18.2 | length 20.7
  Top Layer w0.3: C7.1@117.845,64.12 117.845,57.771 117.933,57.683 119.457,57.683 119.736,57.962 119.736,60.468 120.507,60.468 v1(120.929,60.046) ; v1(126.365,60.172) 126.422,60.229 126.642,60.229 127.28,60.867 R18.2
  Top Layer w0.5: R18.2 127.318,61.099 127.318,62.573 R17.1
  Bottom Layer w0.3: v1(120.929,60.046) 126.158,60.046 126.284,60.172 v1(126.365,60.172)
NetC8_1: C8.1 IC2.7 R15.2 | length 6.6
  Top Layer w0.3: R15.2@118.72,59.182 118.542,59.36 118.542,60.858 118.542,61.599 118.711,61.768 IC2.7 120.79,61.768 121.005,61.983 121.393,61.983 121.717,62.306 C8.1
NetC8_2: C8.2 IC2.6 R14.2 | length 3.6
  Top Layer w0.3: IC2.6 121.657,61.118 C8.2 121.776,61.178 122.123,60.83 R14.2@122.123,59.686
NetC9_2: C9.2 IC2.4 R15.1 R16.2 | length 18.6
  Top Layer w0.3: IC2.4 115.665,60.468 115.67,60.463
  Top Layer w0.5: 115.67,60.463 116.728,60.463 117.17,60.02 117.17,57.598 117.634,57.133 120.735,57.133 ; R15.1@120.752,59.182 120.752,57.15 120.735,57.133 ; C9.2@124.028,62.646 124.028,61.445 123.083,60.499 123.083,59.101 122.586,58.604 122.393,58.604 122.173,58.385 122.173,58.191 122.173,57.998 121.903,57.728 121.795,57.728 121.201,57.133 120.735,57.133
NetC15_1: C15.1 D2.K R30.1 R34.2 | length 46
  Top Layer w0.3: R30.1 R30.1@129.274,81.178 ; R34.2 129.122,81.331 R30.1@129.274,81.178 ; v1(130.036,81.458) 129.757,81.178 R30.1@129.274,81.178
  Top Layer w0.5: v1(119.317,49.987) 120.46,49.987 D2.K 122.67,50.267 C15.1
  Bottom Layer w0.3: 133.671,78.325 134.129,77.867 134.129,76.804 134.125,76.8
  Bottom Layer w0.5: v1(119.317,49.987) 119.317,50.013 132.775,63.47 132.775,75.45 134.125,76.8 ; v1(130.036,81.458) 130.642,81.458 133.629,78.471
NetF1_2: F1.2 pad.11 | length 1.4
  Top Layer w0.75: pad.11@92.799,63.351 F1.2
NetIC1_1: IC1.1 R2.1 R3.2 | length 6.6
  Top Layer w0.3: R2.1@102.6,85.125 102.6,86.85 103.2,87.45 ; R3.2@102.9,88.818 102.85,88.768 102.85,87.8 103.2,87.45 ; IC1.1@105.675,87.45 103.2,87.45
NetIC1_3: IC1.3 R1.2 | length 11
  Top Layer w0.3: R1.2@99.975,90.218 100.05,90.143 100.05,89.518 101.225,88.343 101.225,84.35 102.054,83.521 IC1.3
NetIC1_4: IC1.4 R2.2 | length 2.8
  Top Layer w0.3: R2.2@102.846,81.45 IC1.4@105.675,81.45
NetIC1_17: IC1.17 R36.2 | length 2.6
  Top Layer w0.3: IC1.17 121.751,77.501 R36.2@123.138,78.888
NetIC1_18: IC1.18 R4.1 X3.3 | length 26.5
  Top Layer w0.3: IC1.18@120.925,79.45 117.464,79.45 115.975,80.939 115.975,87.85 115.975,88.1 118.05,90.175 122.568,90.175 123.375,90.175 124.475,90.175 125.825,91.525 X3.3
NetIC1_22: IC1.22 R37.1 X3.2 | length 22.8
  Top Layer w0.254: IC1.22 122.017,87.508 122.697,88.189 124.653,88.189 124.819,88.023 127.438,88.023 130.012,90.597 ; R37.1@122.975,96.241 124.092,96.241 v1(124.11,96.258) ; v1(127.928,90.597) 130.012,90.597 ; X3.2@130.181,91.49 X3.2 130.012,90.597
  Bottom Layer w0.254: v1(124.11,96.258) 124.11,94.415 v1(127.928,90.597)
NetIC2_3: IC2.3 L1.2 | length 8.5
  Top Layer w0.3: 112.903,61.163 112.949,61.118 IC2.3
  Top Layer w0.75: L1.2 108.835,66.246 109.765,65.316 109.965,65.316 111.785,63.496 111.785,62.281 112.903,61.163
NetIC3_1: IC3.1 L2.1 | length 2
  Top Layer w0.3: L2.1 IC3.1@100.173,101.478
NetIC3_4: IC3.4 R20.1 R21.1 | length 4.8
  Top Layer w0.3: IC3.4 R20.1@104.27,104.095 ; R21.1@104.296,101.2 R20.1@104.296,104
NetIC4_1: IC4.1 R29.2 R30.2 | length 16.4
  Top Layer w0.2: R29.2@123.534,80.442 124.45,79.525 124.45,77.8 124.75,77.5 125.111,77.5 125.608,77.003 125.976,77.003 126.238,77.265 126.66,77.265 127.125,77.73 v1(127.125,77.711) ; IC4.1 129.769,79.35 130.1,79.019 v1(130.1,78.872)
  Top Layer w0.3: R29.2@123.534,80.442 124.905,81.813 126.607,81.813 R30.2@127.242,81.178
  Bottom Layer w0.2: 127.125,78.204 v1(127.125,77.711) 127.125,78.225 127.625,78.725 127.772,78.872 v1(130.1,78.872) v1@130.1,78.65
NetIC4_3: IC4.3 R38.2 R44.2 | length 115.7
  Top Layer w0.2: v1(126.963,80.035) 126.963,79.712 127.325,79.35 IC4.3
  Top Layer w0.3: v1@118.946,51.029 119.073,51.156 v1(119.089,51.156) 119.055,51.156 R38.2 ; R38.2@120.453,52.25 R44.2
  Bottom Layer w0.3: v1(119.089,51.156) 118.901,51.156 118.86,51.115 118.809,51.166 115.675,51.166 114.784,50.275 106.9,50.275 104.788,52.387 104.788,52.904 104.771,52.922 104.771,59.579 100.115,64.235 100.115,100.615 101.175,101.675 106.9,101.675 107.225,101.35 107.225,98.097 108.548,96.774 121.147,96.774 123.633,94.288 123.633,87.775 126.963,84.445 v1(126.963,80.035)
NetIC4_6: IC4.6 R24.2 | length 5.9
  Top Layer w0.2: R24.2 126.147,76.203 126.15,76.2 126.305,76.2 126.567,76.462 129.037,76.462 129.35,76.775 IC4.6@129.35,77.375
NetIC5_1: IC5.1 R23.1 | length 2.4
  Top Layer w0.5: R23.1 IC5.1@102.975,66.104
NetIC6_1: IC6.1 R40.1 R41.2 | length 5.2
  Top Layer w0.3: R41.2 116.053,99.228 116.246,99.421 ; R40.1 116.246,99.421 ; IC6.1 116.81,98.857 116.246,99.421
NetIC6_3: IC6.3 R39.1 R41.1 | length 6.9
  Top Layer w0.3: R39.1 114.021,99.453 R41.1 115.006,96.915 118.493,96.915 IC6.3
NetQ1_1: Q1.1 Q2.1 R6.2 R7.2 | length 10.8
  Top Layer w0.3: Q1.1 96.8,79.397 R6.2@98.272,77.925
  Top Layer w0.4: R7.2@94.882,87.368 Q1.1
NetQ1_2: "X1.4 - Piros" Q1.2 R8.2 | length 27.8
  Top Layer w0.3: 91.808,85.598 91.995,85.598 ; 92.62,85.598 92.504,85.598 91.02,87.082 91.02,90.718 91.445,91.143 94.082,91.143 94.182,91.243 94.95,92.011 94.95,98.701 95.989,99.74 100.416,99.74 100.956,99.201 100.956,99.04 R8.2@101.921,98.075 ; 94.2,85.55 94.8,85.55 94.875,85.475 Q1.2
  Top Layer w0.6: 92.525,85.55 94.2,85.55
NetQ1_3: "X1.5 - Sárga" Q1.3 Q2.3 | length 9.2
  Top Layer w0.4: 95.15,83.275 Q1.3@95.875,83.275 ; Q2.3 95.85,80.125 ; 95.85,82 Q1.3@95.85,83.075 ; Q1.3 Q1.3@95.875,83.15
  Top Layer w0.6: 92.35,83.275 95.15,83.275 ; 92.62,83.312 94.294,83.312 ; 95.85,80.125 95.85,82
NetQ2_2: Q2.2 Q4.2 R7.1 R9.1 | length 36.8
  Top Layer w0.4: Q2.2@94.875,81.35 94.9,81.325 94.9,79.95 ; 98.475,86.25 98.55,86.325 Q4.2@98.55,87.525
  Top Layer w0.5: R7.1 97.063,87.525 Q4.2 ; 99.225,76.6 99.546,76.921 99.546,79.179
  Top Layer w0.75: 94.9,79.95 94.9,77.644 95.944,76.6 99.225,76.6 ; 98.441,86.284 98.21,86.284 98.21,80.515 99.546,79.179
  Top Layer w0.9: 92.2,73.661 91.825,74.036 91.825,77.776 91.86,77.776 92.729,78.644 93.542,78.644 94.848,79.95 94.9,79.95
  Top Layer w1.2: 92.2,73.661 92.2,68.575 92.8,67.975 R9.1
NetQ3_1: Q3.1 Q4.1 R11.1 R12.1 | length 22.9
  Top Layer w0.4: R11.1@99.725,96.95 98.375,98.3 96.925,98.3 96.74,98.115 96.3,97.675 96.3,92.916 96.74,92.476 ; R12.1@100.375,82.65 Q4.1@100.375,87.55 ; Q4.1 Q4.1@100.375,87.55 ; 96.74,92.476 96.74,92.475 97.665,91.55 Q3.1@97.666,91.55 ; 96.74,92.476 Q3.1@97.666,91.55 ; Q3.1@97.666,91.55 Q3.1 97.8,90.075 98.575,89.3 99.49,89.3 100.15,88.64 100.15,87.775 Q4.1@100.375,87.55
NetQ3_2: "X1.2 - Zöld" Q3.2 R10.1 | length 18.4
  Top Layer w0.6: 95.495,91.53 95.6,91.636 95.6,98.432 96.258,99.09 99.85,99.09 100.913,98.027 100.913,97.233 R10.1@101.696,96.45
  Top Layer w0.75: 92.62,90.043 94.007,90.043 95.495,91.53
NetQ3_3: "X1.3 - Kék" Q3.3 Q4.3 | length 10.3
  Top Layer w0.4: Q4.3 99.45,86.225
  Top Layer w0.5: 91.995,87.757 92.3,87.757
  Top Layer w0.6: 93.072,87.65 94.032,88.61 97.91,88.61 97.92,88.6 99.2,88.6 99.45,88.35 99.45,86.225
NetQ5_1: Q5.1 R23.2 R32.1 | length 3.1
  Top Layer w0.3: R32.1@101.35,64.125 R23.2@101.35,65.697 ; R32.1 101.354,62.496 Q5.1@101.375,62.475
NetR22_2: pad.6 R22.2 R28.2 | length 8.5
  Top Layer w0.2: R22.2 125.475,73.975 125.854,74.354 128.418,74.354 R28.2
  Top Layer w0.5: R28.2@129.225,73.6 130.928,75.303 pad.6
NetR25_2: pad.3@131.55,82.589 R25.2 | length 4.4
  Top Layer w0.3: R25.2@129.353,85.05 129.353,84.597 pad.3@131.375,82.575 ; pad.3@130.95,82.575 pad.3@131,82.575 ; pad.3@131.15,82.425 pad.3@131,82.575 ; pad.3@131.5,82.45 pad.3@131.375,82.575 ; pad.3@131.6,82.575 pad.3@131.375,82.575 ; pad.3@131,82.575 pad.3@131.375,82.575
PV.: C5.1 L1.1 pad.9 R13.2 | length 18.5
  Top Layer w0.75: v1(121.514,67.056) 121.539,67.031 R13.2 R13.2@121.734,66.066
  Top Layer w1: C5.1@127.8,66.6 129.834,68.634 pad.9@131.552,68.634
  Bottom Layer w1: 116.738,67.056 v1(121.514,67.056) 127.584,67.056 128.88,68.351
  other v1: 116.205,66.192 116.256,67.107 117.069,67.107 128.479,67.852 129.273,67.831 116.662,67.869 128.447,68.732 129.294,68.754
RXD/VCC: IC1.21 R38.1 X3.1 | length 101.1
  Top Layer w0.3: v1(116.93,52.019) 117.094,52.019 117.35,52.275 R38.1@118.396,52.275 ; v1(117.7,88.175) 117.7,87.775 118.925,86.55 ; IC1.21 119.948,85.527 118.925,86.55 ; X3.1@125.9,88.975 119.675,88.975 118.925,88.225 118.925,86.55
  Bottom Layer w0.3: v1(116.93,52.019) 115.394,52.019 114.175,50.8 107.6,50.8 105.876,52.524 105.808,52.524 105.396,52.937 105.396,53.004 105.271,53.129 105.271,60.204 100.625,64.85 100.625,79.025 100.625,99.725 102.025,101.125 102.625,101.125 103.225,100.525 103.225,98.457 113.507,88.175 v1(117.7,88.175)
SCL: IC7.4 R31.1 R35.1 | length 64.1
  Top Layer w0.2: v1@114.025,53.025 114,53.05 114.036,53.086 v1(114.212,53.086) 114.145,53.086 114.042,52.983 IC7.4
  Top Layer w0.3: R31.1 v1(106.1,53.228) ; v1@114.025,53.025 v1@114.042,53.008 ; v1(123.838,81.763) 125.101,83.025 R35.1
  Bottom Layer w0.3: v1(106.1,53.228) 106.524,53.652 111.073,53.652 111.75,52.975 ; v1(114.212,53.086) 114.061,53.086 113.943,52.968 113.943,52.784 113.379,52.221 112.454,52.221 111.75,52.925 111.75,52.975 ; v1(123.838,81.763) 123.838,75.794 122.52,74.475 105.65,74.475 104,72.825 104,64.45 111.75,56.7 111.75,52.975
SDA/DHT: IC7.3 R19.1 R27.2 R28.1 R36.1 | length 60.5
  Top Layer w0.2: v1(113.069,52.934) 113.016,52.934 113.392,52.558 IC7.3
  Top Layer w0.3: R19.1 109.157,53.161 111.28,53.161 111.507,52.934 v1(113.069,52.934) ; R36.1 125.947,78.867 v1(126.785,78.867) ; v1(125.743,75.35) 127.022,75.35 R27.2 129.074,75.578 R28.1
  Bottom Layer w0.3: v1(113.069,52.934) 113.025,52.977 113.025,56.5 104.875,64.65 104.875,72.677 105.598,73.4 123.557,73.4 v1@125.625,75.468 ; v1(125.743,75.35) v1@125.625,75.468 ; v1(126.785,78.867) 126.706,78.867 126.5,78.661 126.5,78.05 125.625,77.175 v1@125.625,75.468
VCC: C1.1 C2.1 C3.1 C4.+ C11.1 C12.1 C13.1 C14.1 D1.K IC1.8 IC3.6 IC4.5 IC5.3 IC6.5 IC7.2 IC7.6 IC7.8 L2.2 pad.5 pad.10 R3.1 R4.2 R9.2 R14.1 R16.1 R18.1 R19.2 R31.2 R33.2 R37.2 R39.2 R42.1 X3.6 | length 352.8
  Top Layer w0.2: C12.1@110.846,49.925 C12.1 111.379,50.271 111.475,50.175 112.078,50.175 IC7.8 ; IC7.2 112.742,51.333 113.386,50.689 IC7.6@113.386,50.264 ; IC7.6 113.386,49.714 113.725,49.375 ; IC4.5@128.7,77.325 128.7,77.97 128.835,78.105 128.931,78.105 129.026,78.2 129.674,78.2 129.769,78.105 129.795,78.105 129.871,78.029 129.908,78.029 130.259,77.678 131.461,77.678 pad.5
  Top Layer w0.3: 90.82,86.221 90.82,86.433 90.8,86.453 90.8,86.595 90.52,86.875 90.52,90.925 91.238,91.643 ; C4.+ 93.35,73.854 92.65,74.554 92.65,77.434 93.06,77.844 93.64,77.844 94.029,77.455 94.1,77.455 94.1,76.919 94.575,76.444 95.004,76.444 95.623,75.825 99.7,75.825 100.4,76.525 101.356,76.525 101.92,77.089 101.925,77.089 102.128,77.292 102.572,77.292 102.775,77.089 102.78,77.089 103.315,76.555 106.899,76.555 ; 94.35,92.118 94.35,92.277 ; L2.2 100.233,103.978 IC3.6 100.35,103.978 100.35,103.703 100.83,103.222 101.803,103.222 101.953,103.072 ; R33.2 99.615,67.832 100.47,68.687 102.722,68.687 103,68.965 103.738,68.965 104.096,69.323 C14.1 ; 102.014,61.075 102.85,61.911 102.85,63.934 104.128,65.212 IC5.3 104.128,69.372 C14.1@104.096,69.404 ; 103.05,100.4 103.15,100.3 103.55,99.9 107.822,99.9 C11.1 ; v1(110.325,100.85) 110.838,100.337 110.838,97.642 114.574,93.906 114.692,93.906 114.994,93.604 122.548,93.604 R4.2 ; v1(114.237,102.794) 114.237,101.803 R39.2 ; IC6.5 122.187,98.857 v1(122.543,99.212) 122.913,98.843 122.913,98.36 R37.2 ; pad.5 133.311,77.589 133.35,77.55 v3(133.35,77.5)
  Top Layer w0.4: 106.899,76.555 107.325,76.98 107.325,77.025 ; C12.1@110.846,49.925 111.396,49.375 113.725,49.375 114.754,49.375 C13.1
  Top Layer w0.5: R42.1 90.768,58.699 v1(90.768,59.334) ; 91.238,91.744 91.217,91.764 93.837,91.764 94.35,92.277 94.35,98.95 95.74,100.34 100.968,100.34 101.762,99.546 102.588,99.546 103.15,100.108 103.15,100.3 103.15,101.875 102.763,102.263 ; C4.+ 94.144,71.2 ; v1(95.289,61.265) 95.86,61.265 ; 96.975,62.95 95.86,61.835 95.86,61.265 ; 101.953,103.072 102.716,102.309 ; R3.1 103.569,90.907 105.793,90.907 109.725,86.975 109.725,85.511 109.726,79.381 107.325,76.98 ; R31.2@105.925,50.225 105.425,50.225 104.9,50.75 104.9,53.693 101.793,56.8 99.225,56.8 98.3,57.725 98.3,58.825 95.86,61.265 ; R31.2@105.95,50.25 R19.2@108.275,50.25 ; R31.2@106.097,50.25 R31.2 ; R19.2 108.283,50.255 C12.1@110.468,50.255 ; C11.1 108.928,100.85 v1(110.325,100.85) ; R16.1 123.991,58.179 123.991,59.804 R14.1 124.003,60.011 124.248,60.255 124.644,60.255 125.012,60.623 125.205,60.623 125.45,60.868 R18.1 125.45,62.304 125.882,62.736 D1.K ; v1(130.525,100.225) 130.805,100.505 X3.6
  Top Layer w0.6: 90.82,86.221 90.82,70.97 91.075,70.715 91.075,66.943 91.675,66.343 ; 91.675,66.343 92.009,66.008 93.727,66.008 94.061,65.674 94.061,64.358 94.501,63.917 95.459,62.959
  Top Layer w0.75: 95.226,63.193 96.732,63.193 96.975,62.95 97,62.95 98.875,61.075 101.814,61.075 102.189,60.7 ; 96.225,69.475 96.225,69.4 96.225,67.404 R9.2 ; 104.396,72.471 105.45,73.525 IC1.8 ; v1(105.725,72.325) 105.725,71.757 v1@106.057,71.425 ; v1(105.982,71.425) v1@106.057,71.425 ; v1(106.846,72.288) 106.846,71.425 v1(106.922,71.349) 106.133,71.349 v1@106.057,71.425 ; v1@130.575,65.125 130.575,64.8 ; 131.35,65.55 130.975,65.175 130.575,65.575 130.575,64.8 ; pad.10@131.6,66.25 v1(131.6,65.175) 131.6,64.8 ; 130.575,64.8 131.6,64.8 ; 130.575,64.8 v1(130.575,64.178) v1(131.6,64.178) 131.6,64.8
  Top Layer w1: 95.226,63.193 94.501,63.917 94.501,64.358 94.501,65.68 R9.2@96.225,67.404 ; 96.225,69.4 C3.1@98.025,71.2 ; C3.1@97.9,71.2 C3.1@98.025,71.2 ; C3.1 C3.1@98.025,71.2 ; C2.1 101.517,71.225 102.763,72.471 C1.1 104.396,72.471 105.579,72.471 105.579,73.396 IC1.8@105.45,73.525 ; C2.1@100.725,71.2 C3.1@98.025,71.2 ; 102.189,60.7 107.814,55.075 127.19,55.075 127.19,55.1 127.215,55.1 129.5,57.385 129.5,63.8 129.5,65.7 ; 129.55,65.85 130.048,66.348
  Top Layer w1.2: 94.4,71.2 C3.1@97.9,71.2
  Bottom Layer w0.3: v1(114.237,102.794) 114.237,101.638 115.025,100.85 ; 116.725,100.175 116.725,100.225 ; v1(122.543,99.212) 122.543,99.666 123.102,100.225
  Bottom Layer w0.5: v1(90.768,59.334) 90.768,59.639 92.393,61.265 v1(95.289,61.265) ; v1(110.325,100.85) 115.025,100.85 115.65,100.225 116.725,100.225 123.102,100.225 v1(130.525,100.225)
  Bottom Layer w0.75: v1(105.982,71.425) 105.982,72.017 106.008,72.042 106.625,71.425 ; 131.6,64.8 v1(131.6,65.175) 131.6,75.75 v3(133.35,77.5)
  Bottom Layer w1: v1(105.725,72.325) 106.375,72.325 106.5,72.2 ; 131.525,64.8 131.575,64.75 131.7,64.75
  Bottom Layer w1.5: 106.5,72.2 113.9,64.8 131.525,64.8 131.575,64.8
  other v1: 130.6,65.175
pads on no net: "*.1 - Fekete" "*.2 - Zöld" "*.3 - Kék" "*.4 - Piros" "*.5 - Sárga" IC1.9 IC1.10 IC1.11 IC1.12 IC1.13 IC1.14 L2.0 R42.2 U.1 U.2 U.3 U.4 U.5 U.6 U.7
copper on no net: | length 1.3
  Top Layer w0.2: 108.25,71.525 108.25,72.423
  Top Layer w0.3: 131.35,84.875 131.55,84.875 ; 131.525,80.339 131.687,80.416

## Polygon pours and split planes (outlines as drawn)
PV. on Top Layer "NONET_L-01_P-001" (solid, pour order 10): 117.221,66.472 117.221,67.996 117.065,68.151 115.557,68.135 115.418,67.996 115.418,65.684 116.434,65.684
PV. on Top Layer "NONET_L-01_P-001" (solid, pour order 7): 127.965,67.361 127.965,69.012 128.118,69.164 130.48,69.164 130.48,67.996 130.505,67.97 129.218,66.683 127.964,66.683
GND on Top Layer "GND" (solid, remove dead copper, pour order 2): 156.312,64.872 156.312,106.474 156.312,106.549 165.327,115.56 192.172,115.56 192.172,115.535 200.987,106.724 200.987,64.646 200.987,64.621 192.222,55.86 192.197,55.885 165.327,55.885 156.312,64.897
VCC on Top Layer "VCC" (solid, pour order 6): 105.347,71.958 107.227,71.958 107.227,73.609 106.719,74.117 105.347,74.117
GND on Bottom Layer "GND" (solid, pour order 9): 89.761,57.996 89.761,99.656 98.772,108.663 98.797,108.638 125.627,108.638 134.411,99.856 134.411,57.746 134.361,57.746 125.627,49.013 98.747,49.013 89.761,57.996
PV. on Bottom Layer "NONET_L-01_P-001" (solid, pour order 8): 116.637,65.938 117.526,66.827 117.526,67.691 117.065,68.151 116.056,68.151 115.773,67.869 115.799,67.843 115.799,65.71 116.459,65.71 116.637,65.888
PV. on Bottom Layer "NONET_L-01_P-001" (solid, pour order 5): 128.02,69.067 128.128,69.175 129.715,69.175 129.715,67.517 129.726,67.507 129.651,67.432 128.058,67.432 128.058,69.148 128.024,69.182

## Other copper
Top Layer:
  rectangle net VCC: 105.85,71.425 106.82,72.2
  rectangle net GND: 111.088,75.971 115.253,77.927
Bottom Layer:
  rectangle net VCC: 105.85,71.425 106.82,72.2
  rectangle net VCC: 106.82,71.425 107.049,71.501
  text "PCB prototype v3" at 113,57.775 h0.8

## Silkscreen, mask and mechanical layers (free items; w line width, h text height)
Top Overlay:
  text "BAT GND." at 91.134,61.042 h0.6
  text "GND PV=>solar panel GND, BATT GND" at 133.77,58.268 h0.55 r90
Bottom Overlay:
  text "PCB prototype v4" at 108.275,62.275 h1.25
  text "2019.4" at 110.85,59.8 h1.25
Mechanical 1:
  the board outline again, w0.4

## Text inside footprints (layer, text, board x,y; h text height)
C4: Top Overlay "+" at 93.025,70.4 h0.89 r90
IC1: Top Overlay "MISO" at 110.55,73 h0.6 r90; Top Overlay "RST" at 107.15,87.1 h0.7; Top Overlay "ADC" at 107.15,85.1 h0.7; Top Overlay "EN" at 107.14,83.14 h0.7; Top Overlay "GPIO16" at 107.15,81.1 h0.7; Top Overlay "GPIO14" at 107.105,79.073 h0.7; Top Overlay "GPIO12" at 107.15,77.2 h0.7; Top Overlay "GPIO13" at 107.05,75.7 h0.6; Top Overlay "Vcc" at 107.05,74 h0.6; Top Overlay "CS0" at 107.305,72.973 h0.6; Top Overlay "GPIO9*" at 112.65,73.2 h0.7 r90; Top Overlay "GPIO10*" at 114.65,73.2 h0.7 r90; Top Overlay "MOSI" at 116.45,73.1 h0.6 r90; Top Overlay "GND" at 118.105,73.873 h0.6; Top Overlay "GPIO15" at 116.45,75.4 h0.6; Top Overlay "GPIO2" at 116.25,77.2 h0.7; Top Overlay "GPIO0" at 116.25,79.1 h0.7; Top Overlay "GPIO4" at 116.15,81.1 h0.7; Top Overlay "GPIO5" at 116.15,83 h0.7; Top Overlay "RXD0" at 116.75,85.1 h0.7; Top Overlay "TXD0" at 116.75,87.1 h0.7; Top Overlay "*only ESP12-D" at 108.55,89 h0.7